# Altium PCB PCB.PcbDoc (part 1 of 2)
Units mil, origin at the board's own origin, x right, y up, seen from the top; angles counter-clockwise.
Board outline 3500 x 2500 mil, 4 copper layers (Layer 1, Layer 2, Layer 3, Layer 4), stack 23.756 mil thick; 83 components, 64 nets, 341 pads, 402 vias.
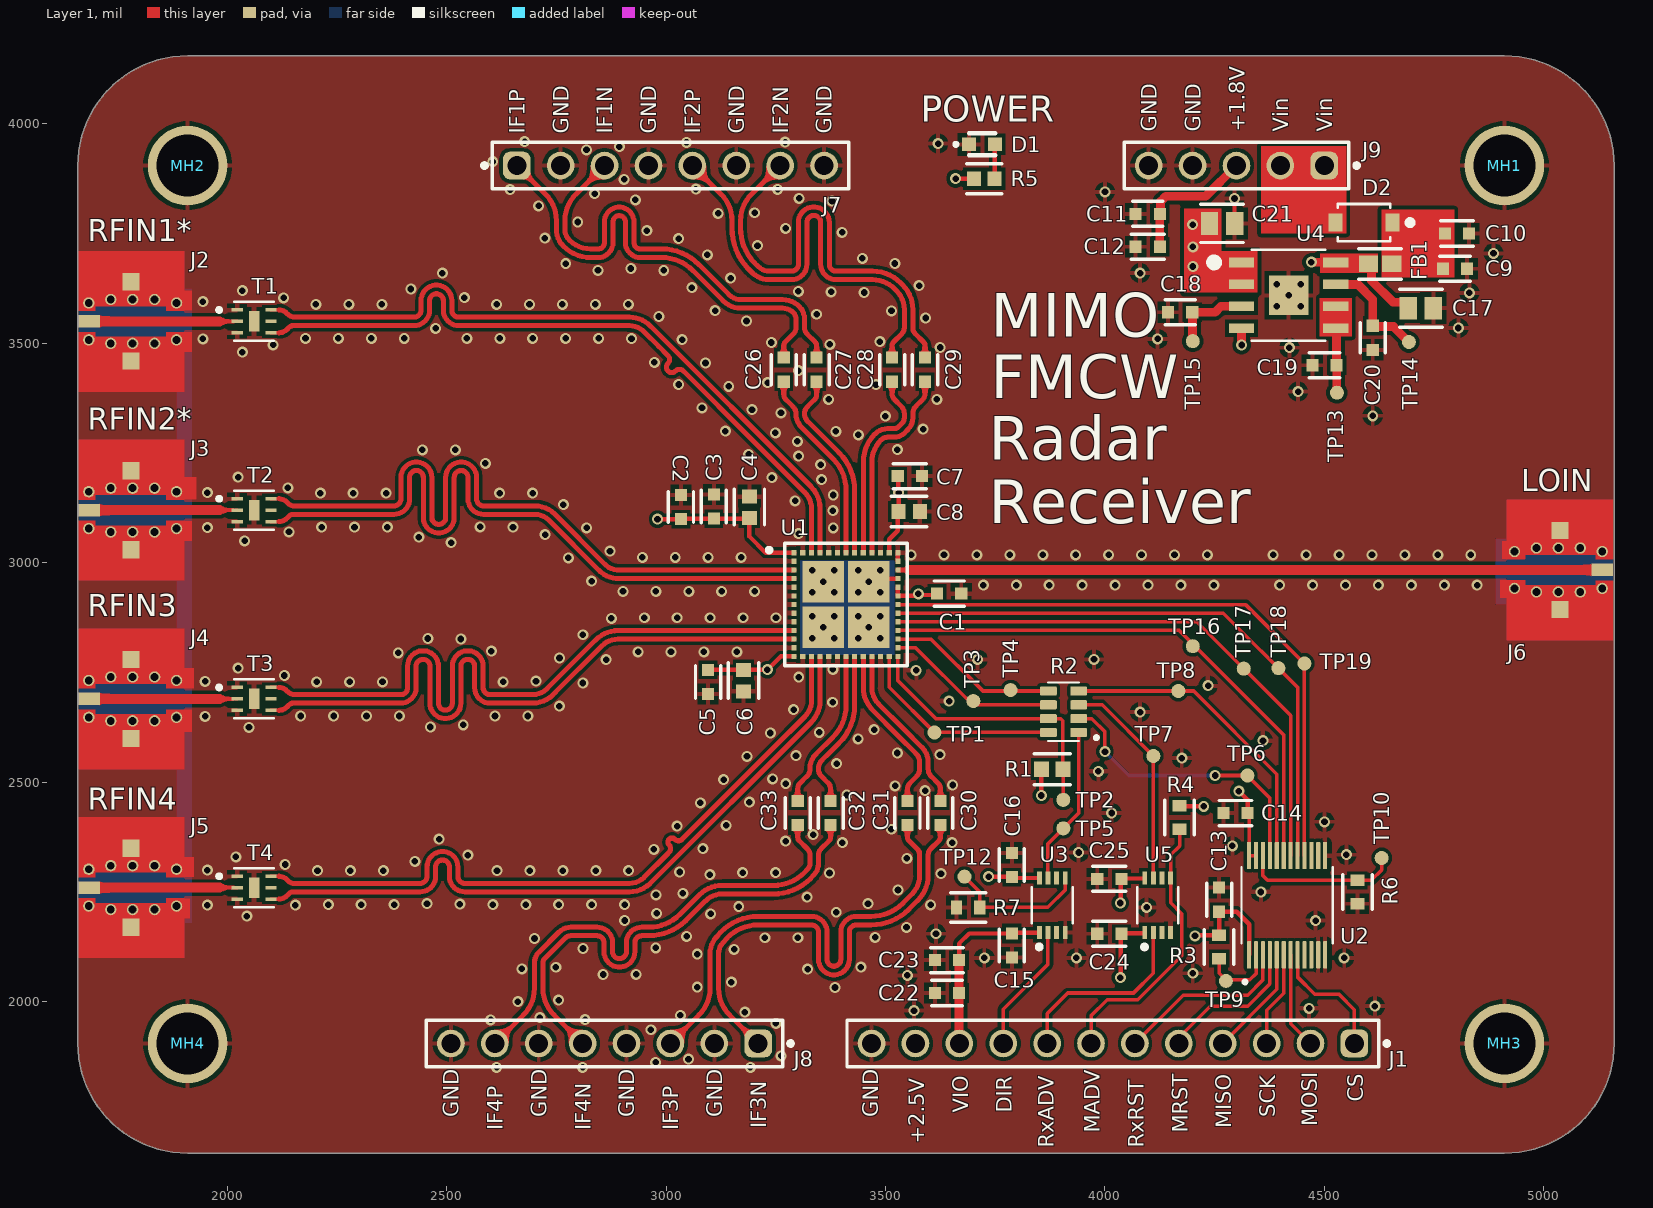
[diagram p0: Layer 1 view]
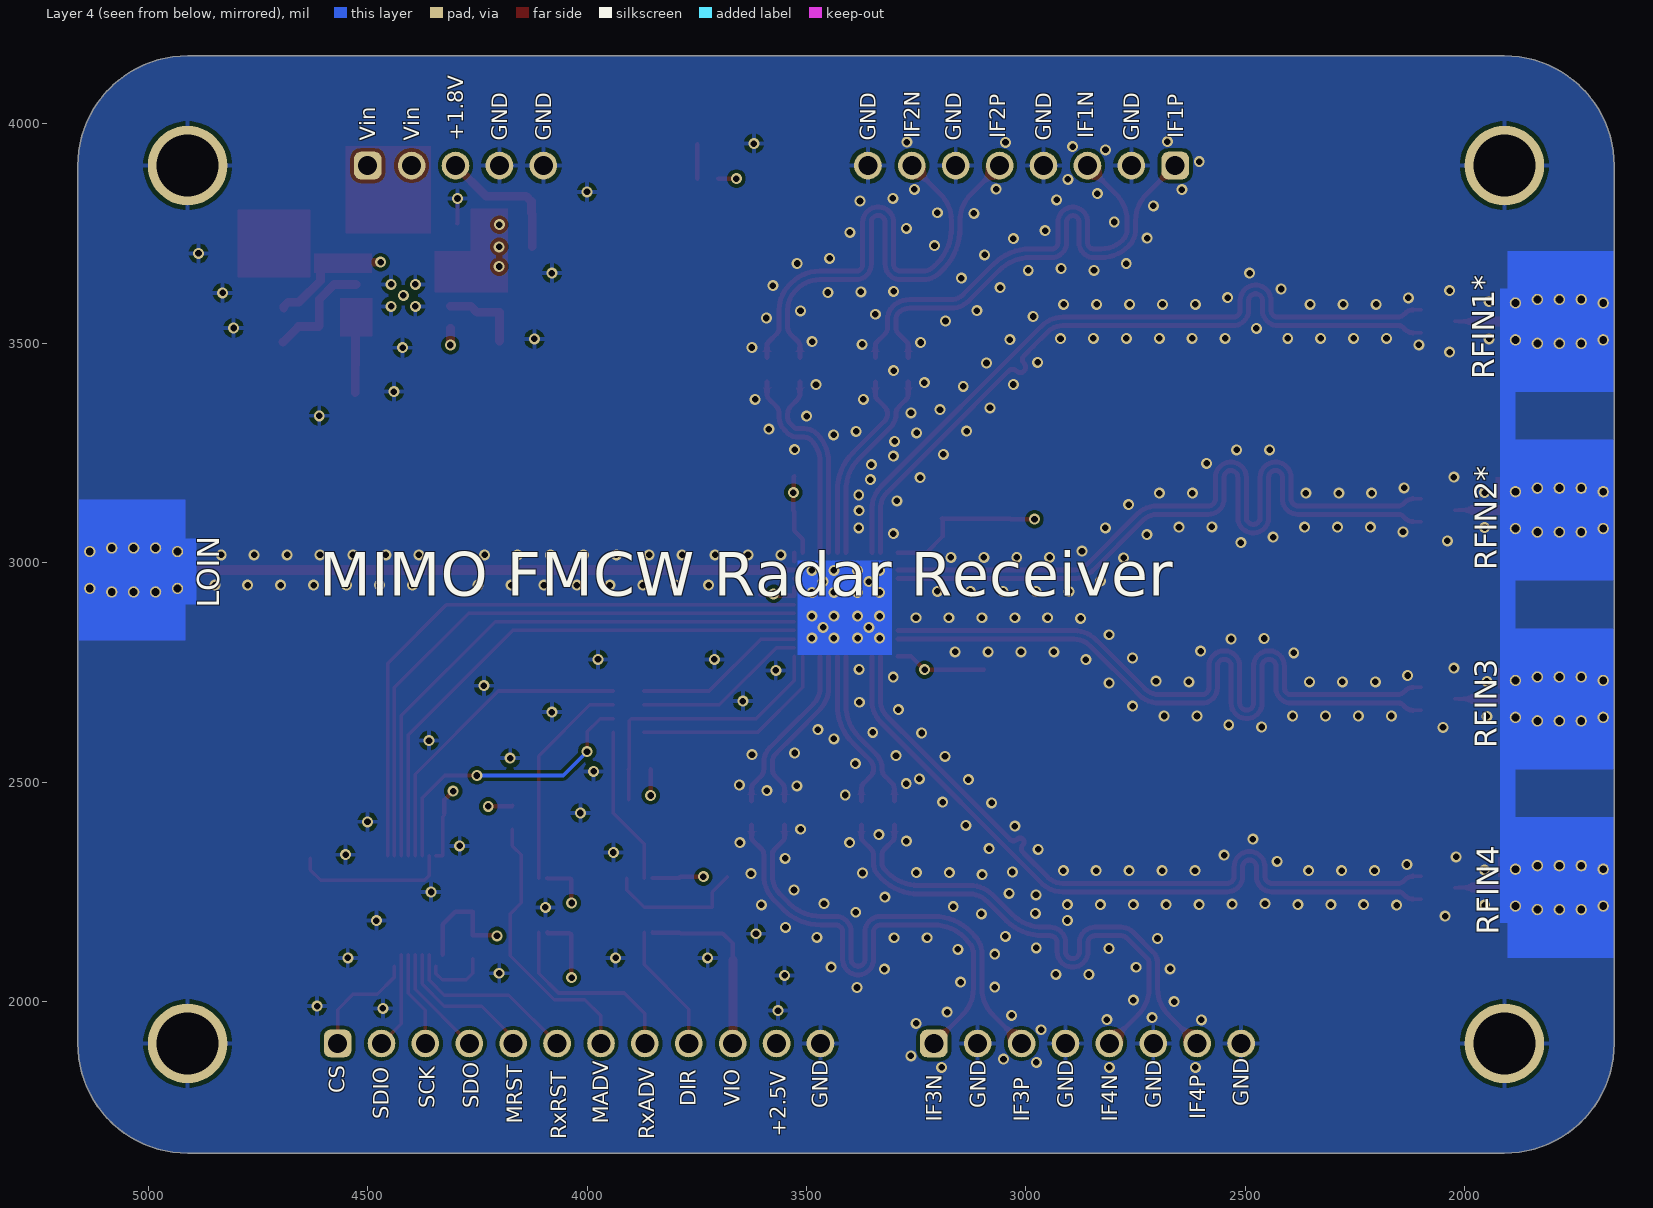
[diagram p1: Layer 4 view, seen from below]
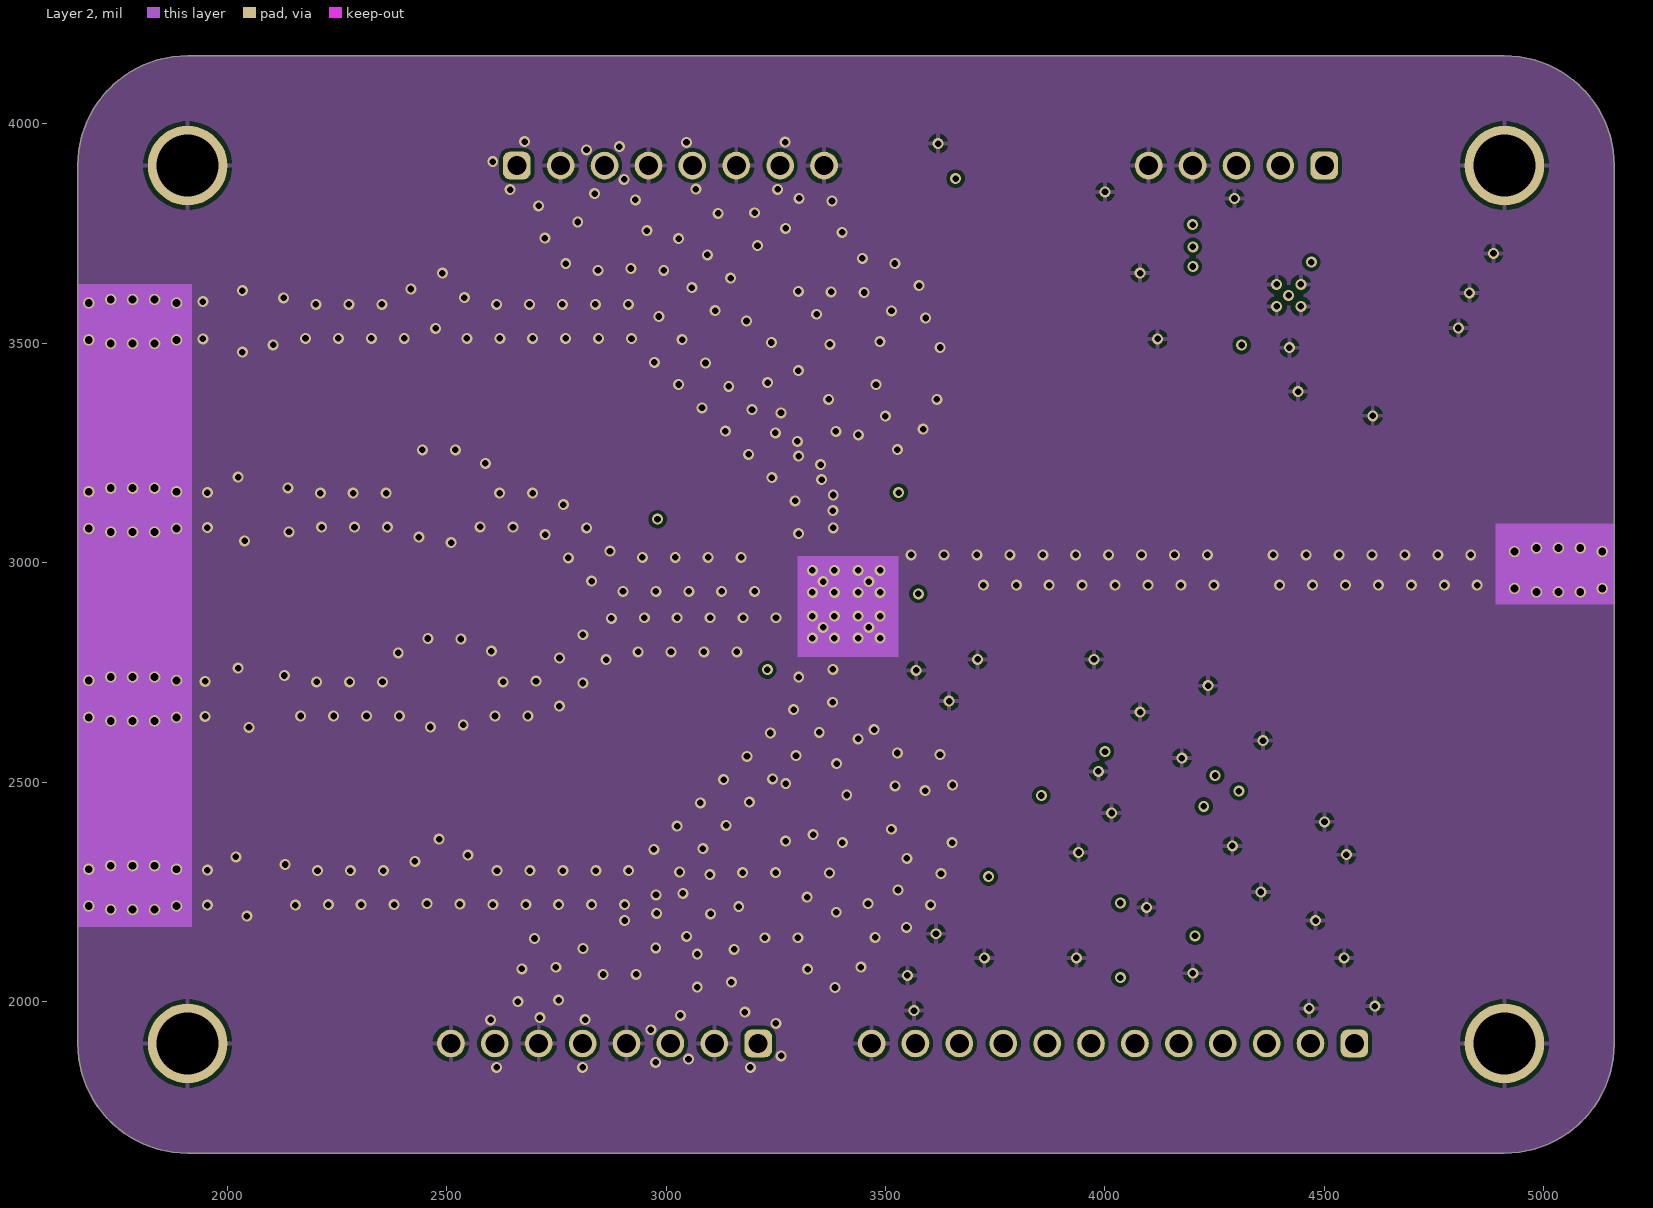
[diagram p2: Layer 2]
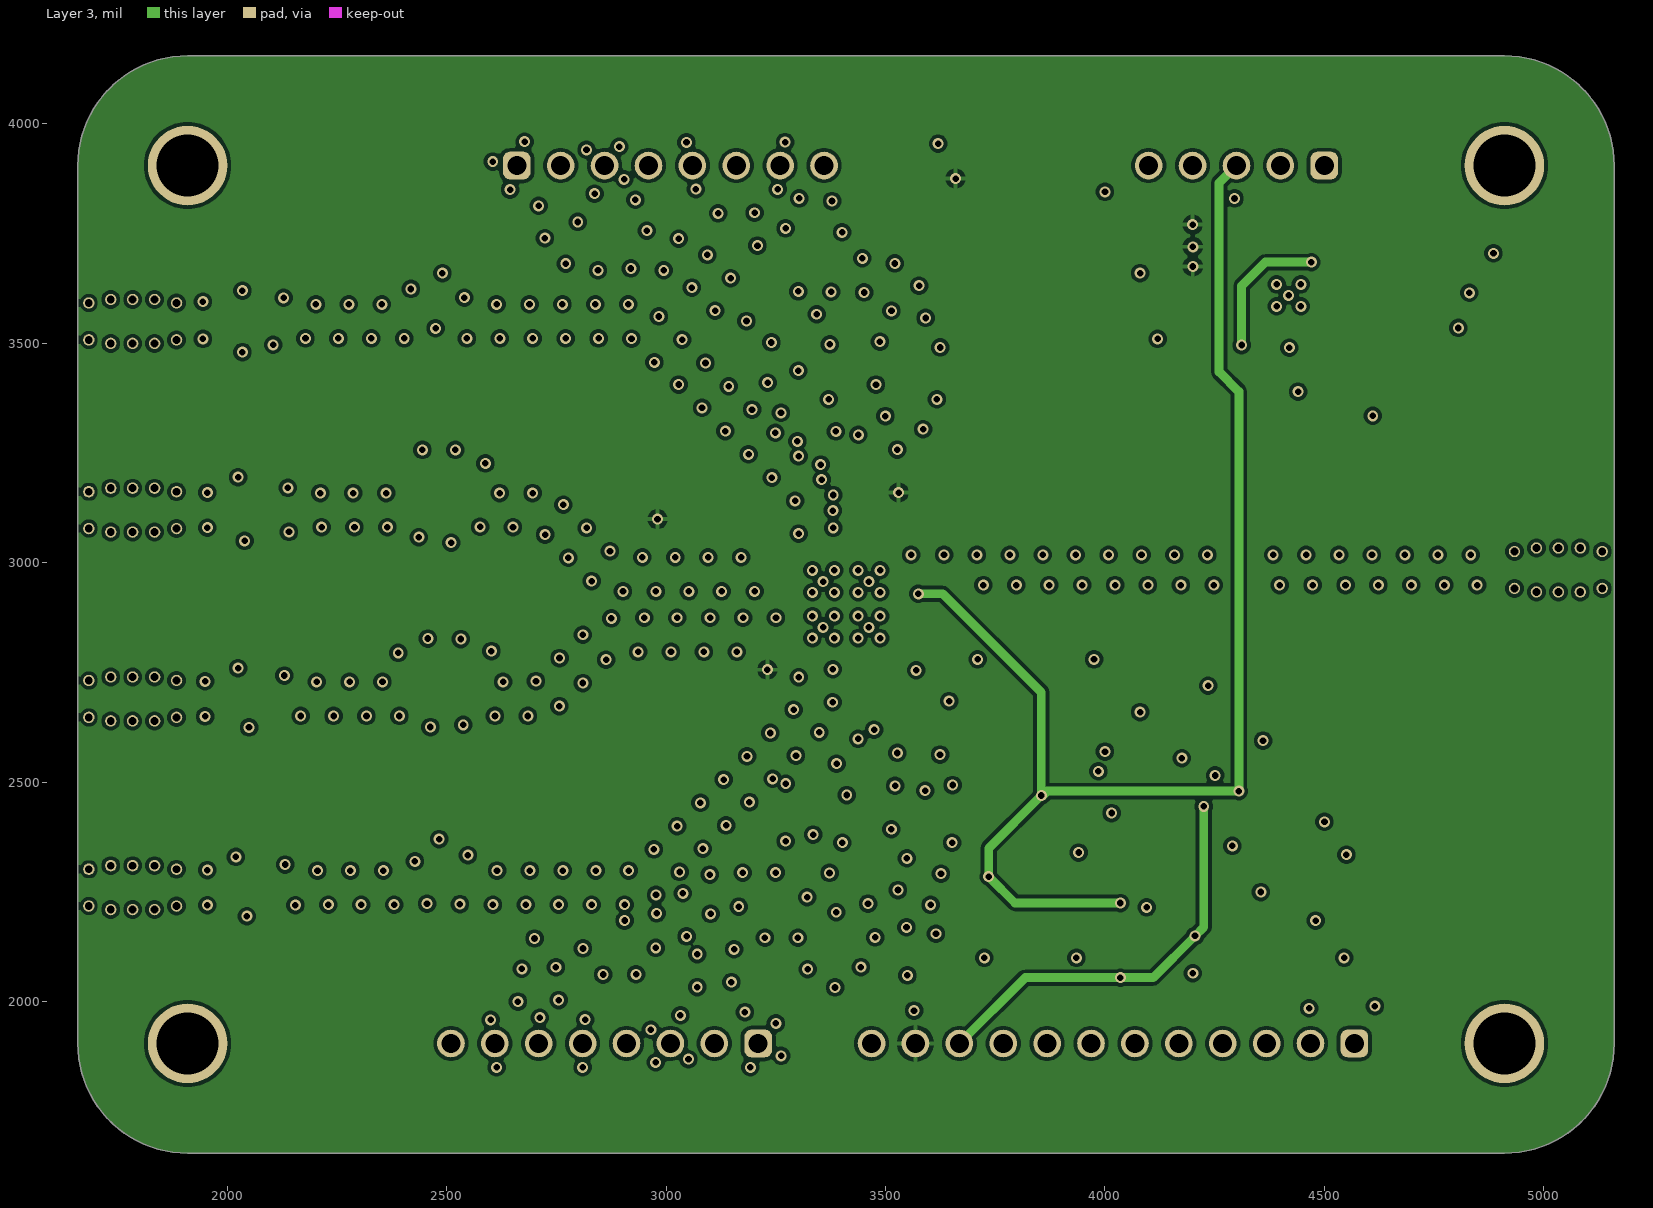
[diagram p3: Layer 3]
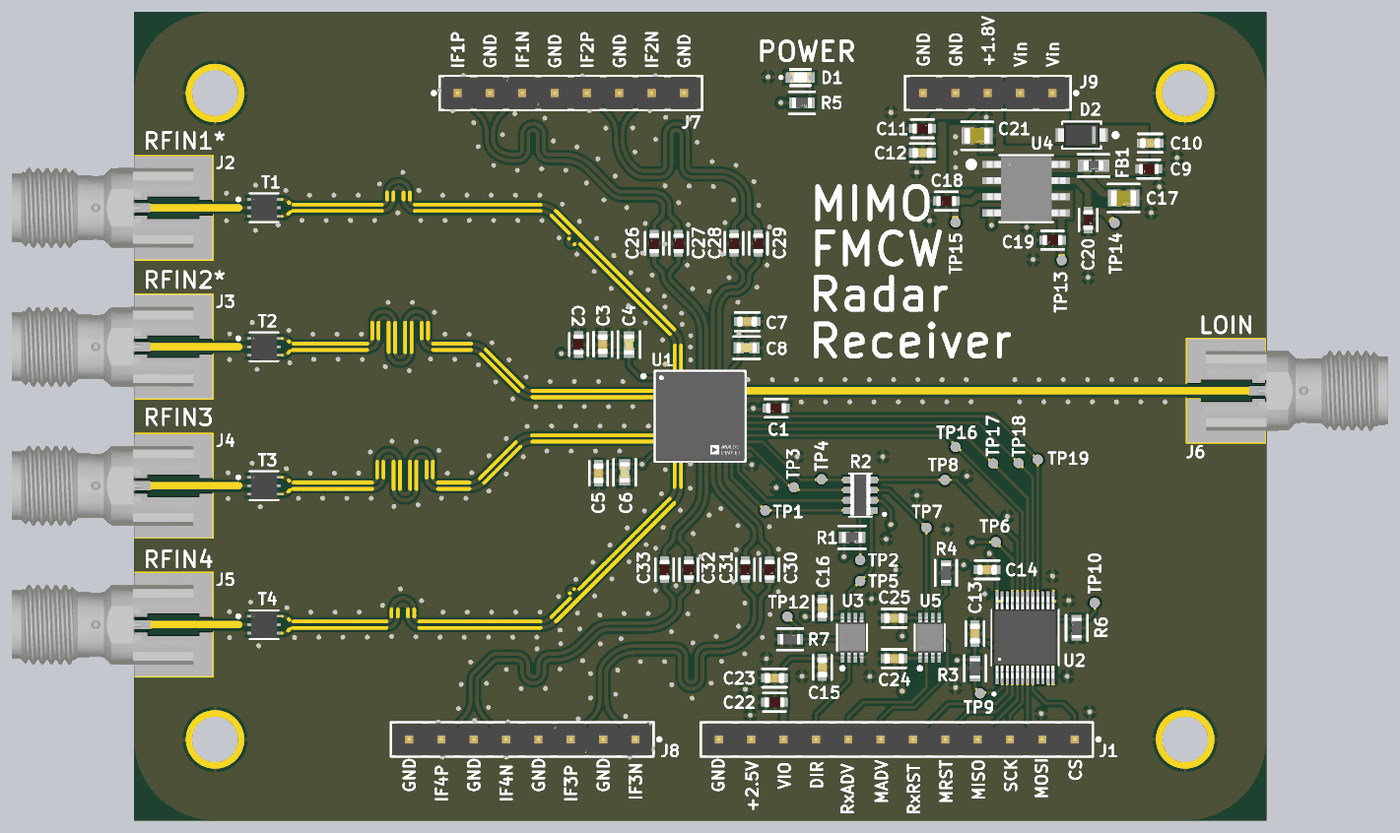
[diagram p5: 3D render of the assembled board from above, using the file's embedded part models]

## Layer stack, top to bottom
Top Solder: solder mask 0.4, Solder Resist, Dk 3.5
Layer 1: signal copper 1.378
Dielectric 2: prepreg 2.8, PP-006, Dk 4.1
Layer 2: signal copper 1.4
Dielectric 1: dielectric 12.6, FR-4, Dk 4.8
Layer 3: signal copper 1.4
Dielectric 3: prepreg 2.8, PP-006, Dk 4.1
Layer 4: signal copper 1.378
Bottom Solder: solder mask 0.4, Solder Resist, Dk 3.5

## Board outline
1660,1905 1660,3905 cw(c1910,3905) 1910,4155 4910,4155 cw(c4910,3905) 5160,3905 5160,1905 cw(c4910,1905) 4910,1655 1910,1655 cw(c1910,1905)

## Design rules (kind name [scope] priority, off if disabled: settings)
Clearance [All] p1: gap=8 ignorepadtopadclearanceinfootprint=TRUE except(6: Arc-Arc Arc-Track Arc-SMDPad Track-Track Track-SMDPad SMDPad-SMDPad)
DiffPairsRouting [All] p1: maxlimit=8 minlimit=8 mostfreqgap=8 toplayer_minwidth=11.46 toplayer_maxwidth=11.46 toplayer_prefwidth=11.46 midlayer1_minwidth=11.46 midlayer1_maxwidth=11.46 midlayer1_prefwidth=11.46 midlayer2_minwidth=11.46 midlayer2_maxwidth=11.46 midlayer2_prefwidth=11.46 bottomlayer_minwidth=11.46 bottomlayer_maxwidth=11.46 bottomlayer_prefwidth=11.46 maxuncoupledlength=500
HoleSize [All] p1: absolutevalues=TRUE maxlimit=50000 minlimit=1 maxpercent=80.000 minpercent=20.000
HoleToHoleClearance [All] p1: gap=6 allowstackedmicrovias=TRUE
MinimumSolderMaskSliver [All] p1: minsoldermaskwidth=6
PolygonConnect PolygonConnectViaShield [InNamedUnion('Via Shieldings') OR InNamedUnion('Via Shieldings 1') OR InNamedUnion('Via Shieldings 2') OR InNamedUnion('Via Shieldings 3') OR InNamedUnion('Via Shieldings 4') OR InNamedUnion('Via Shieldings 5') OR InNamedUnion('Via Shieldings 6') OR InNamedUnion('Via Shieldings 7') OR InNamedUnion('Via Shieldings 8') OR InNamedUnion('Via Shieldings 9')  OR InNamedUnion('Via Shieldings 10') OR InNamedUnion('Via Shieldings 11')  OR InNamedUnion('Via Shieldings 12')] p1: connectstyle=Direct reliefconductorwidth=10 reliefentries=4 polygonreliefangle="90 Angle" airgapwidth=10
PolygonConnect [All] p2: connectstyle=Relief reliefconductorwidth=10 reliefentries=4 polygonreliefangle="90 Angle" airgapwidth=10
RoutingVias [All] p1: holewidth=28 width=50 viastyle="Through Hole" minholewidth=28 minwidth=50 maxholewidth=28 maxwidth=50
SilkToSolderMaskClearance [IsPad] p1: minsilkscreentomaskgap=6 clearancetoexposedcopper=TRUE
SolderMaskExpansion [All] p1: expansion=4 istentingtop=FALSE
SupplyNets "Schematic Supply Nets_6" [InNet('VLogic')] p1: voltage=0.000
SupplyNets "Schematic Supply Nets_5" [InNet('VinF')] p2: voltage=0.000
SupplyNets "Schematic Supply Nets_4" [InNet('+1.8')] p3: voltage=0.000
SupplyNets "Schematic Supply Nets_3" [InNet('Vin')] p4: voltage=0.000
SupplyNets "Schematic Supply Nets_2" [InNet('GND')] p5: voltage=0.000
SupplyNets "Schematic Supply Nets" [InNet('+2.5')] p6: voltage=0.000
Width [All] p1: maxlimit=5000 minlimit=6 preferedwidth=10
25 further rules are at their usual default settings.

## Classes and differential pairs
component class Power: C9 C10 C11 C12 C17 C18 C19 C20 C21 C22 C23 D1 D2 FB1 R5 TP13 TP14 TP15 U4
component class Interface: C13 C14 C15 C16 C24 C25 C26 C27 C28 C29 C30 C31 C32 C33 J1 J2 J3 J4 J5 J6 J7 J8 J9 R3 R4 R6 R7 TP9 TP10 TP12 TP16 TP17 TP18 TP19 U2 U3 U5
component class Receiver: C1 C2 C3 C4 C5 C6 C7 C8 MH1 MH2 MH3 MH4 R1 R2 T1 T2 T3 T4 TP1 TP2 TP3 TP4 TP5 TP6 TP7 TP8 U1
differential pair IFOUT4_CAP: +IFOUT4_CAP_P -IFOUT4_CAP_N
differential pair IFOUT3_CAP: +IFOUT3_CAP_P -IFOUT3_CAP_N
differential pair IFOUT2_CAP: +IFOUT2_CAP_P -IFOUT2_CAP_N
differential pair IFOUT1_CAP: +IFOUT1_CAP_P -IFOUT1_CAP_N
differential pair RFIN4: +RFIN4_P -RFIN4_N
differential pair RFIN3: +RFIN3_P -RFIN3_N
differential pair RFIN2: +RFIN2_P -RFIN2_N
differential pair RFIN1: +RFIN1_P -RFIN1_N
differential pair IFOUT4: +IFOUT4_P -IFOUT4_N
differential pair IFOUT3: +IFOUT3_P -IFOUT3_N
differential pair IFOUT2: +IFOUT2_P -IFOUT2_N
differential pair IFOUT1: +IFOUT1_P -IFOUT1_N

## Components (designator, comment, footprint, x,y, rotation, side; value= is the part's Value field where it differs from the comment)
C1 "1 μF" FP-0603-L_1_6_0_15-W_0_8-MFG 3645,2930 r180 top value=1uF
C2 "1 μF" FP-0603-L_1_6_0_15-W_0_8-MFG 3034.08,3126.95 r270 top value=1uF
C3 "10 nF" CGA3E2X7R1H103K080AA-Footprint-1 3109.04,3128.14 r90 top value=10nF
C4 "100 pF" FP-C0603C-CF-IPC_C 3189.91,3126.78 r90 top value=100pF
C5 "10 nF" CGA3E2X7R1H103K080AA-Footprint-1 3095.71,2728.59 r270 top value=10nF
C6 "100 pF" FP-C0603C-CF-IPC_C 3176.57,2731.49 r270 top value=100pF
C7 "10 nF" CGA3E2X7R1H103K080AA-Footprint-1 3555.46,3197.64 r0 top value=10nF
C8 "100 pF" FP-C0603C-CF-IPC_C 3553.81,3116.77 r0 top value=100pF
C9 "1 μF" FP-0603-L_1_6_0_15-W_0_8-MFG 4797.56,3670 r180 top value=1uF
C10 "100 nF" FP-CGA3E-0_3-0_1-MFG 4801.71,3750.23 r0 top value=100nF
C11 "1 μF" FP-0603-L_1_6_0_15-W_0_8-MFG 4097.44,3795 r0 top value=1uF
C12 "100 nF" FP-CGA3E-0_3-0_1-MFG 4097.44,3720.04 r180 top value=100nF
C13 "100 nF" FP-CGA3E-0_3-0_1-MFG 4260,2232.56 r90 top value=100nF
C14 "100 nF" FP-CGA3E-0_3-0_1-MFG 4297.56,2430 r180 top value=100nF
C15 "100 nF" FP-CGA3E-0_3-0_1-MFG 3788.02,2128.1 r270 top value=100nF
C16 "100 nF" FP-CGA3E-0_3-0_1-MFG 3788.02,2311.65 r90 top value=100nF
C17 "10 μF" FP-GRM21B-0_15-IPC_C 4719.57,3580.28 r0 top value=10uF
C18 "1 μF" FP-0603-L_1_6_0_15-W_0_8-MFG 4171.25,3570.86 r180 top value=1uF
C19 "1 μF" FP-0603-L_1_6_0_15-W_0_8-MFG 4500,3450 r180 top value=1uF
C20 "1 μF" FP-0603-L_1_6_0_15-W_0_8-MFG 4610,3512.56 r270 top value=1uF
C21 "10 μF" FP-GRM21B-0_15-IPC_C 4266.71,3773.08 r0 top value=10uF
C22 "1 μF" FP-0603-L_1_6_0_15-W_0_8-MFG 3640,2020 r0 top value=1uF
C23 "100 nF" FP-CGA3E-0_3-0_1-MFG 3640,2095 r180 top value=100nF
C24 "100 nF" FP-CGA3E-0_3-0_1-MFG 4010,2155 r180 top value=100nF
C25 "100 nF" FP-CGA3E-0_3-0_1-MFG 4010,2280 r180 top value=100nF
C26 "1 μF" FP-0603-L_1_6_0_15-W_0_8-MFG 3268.22,3440 r90 top value=1uF
C27 "1 μF" FP-0603-L_1_6_0_15-W_0_8-MFG 3343.18,3440 r90 top value=1uF
C28 "1 μF" FP-0603-L_1_6_0_15-W_0_8-MFG 3515,3440 r90 top value=1uF
C29 "1 μF" FP-0603-L_1_6_0_15-W_0_8-MFG 3589.96,3440 r90 top value=1uF
C30 "1 μF" FP-0603-L_1_6_0_15-W_0_8-MFG 3624.96,2430 r270 top value=1uF
C31 "1 μF" FP-0603-L_1_6_0_15-W_0_8-MFG 3550,2430 r270 top value=1uF
C32 "1 μF" FP-0603-L_1_6_0_15-W_0_8-MFG 3374.96,2430 r270 top value=1uF
C33 "1 μF" FP-0603-L_1_6_0_15-W_0_8-MFG 3300,2430 r270 top value=1uF
D1 "LTST-C190KRKT" LTST-C190KRKT-Footprint-1 3720.24,3953.39 r0 top
D2 "PMEG2010BER,115" PMEG2010BER,115-Footprint-1 4590,3775 r180 top
FB1 "BLM18AG601SN1D" FP-BLM18-0_15-t0_8-IPC_B 4626.68,3680.95 r0 top value=380mΩ
J1 "61301211121" 61301211121 4018.23,1905 r180 top
J2 "142-1701-831" 142-1701-831-Footprint-1 1781,3550 r90 top locked
J3 "142-1701-831" 142-1701-831-Footprint-1 1781,3120 r90 top locked
J4 "142-1701-831" 142-1701-831-Footprint-1 1781,2690 r90 top locked
J5 "142-1701-831" 142-1701-831-Footprint-1 1781,2260 r90 top locked
J6 "142-1701-831" 142-1701-831-Footprint-1 5036.8,2983.74 r270 top
J7 "61300811121" 61300811121 3010,3905 r0 top
J8 "61300811121" 61300811121 2860,1905 r180 top
J9 "61300511121" 61300511121 4299.53,3905 r180 top (schematic designator J7)
MH1 "M3 Plated Mounting Hole - Loose" "M3 Plated Mounting Hole-Footprint-1" 4910,3905 r0 top locked
MH2 "M3 Plated Mounting Hole - Loose" "M3 Plated Mounting Hole-Footprint-1" 1910,3905 r0 top locked
MH3 "M3 Plated Mounting Hole - Loose" "M3 Plated Mounting Hole-Footprint-1" 4910,1905 r0 top locked
MH4 "M3 Plated Mounting Hole - Loose" "M3 Plated Mounting Hole-Footprint-1" 1910,1905 r0 top locked
R1 "200 kΩ" FP-RG1608-IPC_C 3880,2530 r0 top value=200kΩ
R2 "22 Ω" CAY16-22R0F4LF-Footprint-1 3905.55,2660.75 r180 top value=22Ω
R3 "10 kΩ" FP-RC0603-0_55-IPC_C 4260,2125 r90 top value=10kR
R4 "10 kΩ" FP-RC0603-0_55-IPC_C 4170,2420 r90 top value=10kR
R5 "150 Ω" FP-RMCF0603-IPC_C 3725,3875 r0 top value=150Ω
R6 "10 kΩ" FP-RC0603-0_55-IPC_C 4575,2250 r90 top value=10kR
R7 "10 kΩ" FP-RC0603-0_55-IPC_C 3688.36,2215 r0 top value=10kR
T1 "MTY2-243+" MTY2-243+-Footprint-1 2066.5,3550 r0 top
T2 "MTY2-243+" MTY2-243+-Footprint-1 2066.5,3120 r0 top
T3 "MTY2-243+" MTY2-243+-Footprint-1 2066.5,2690 r0 top
T4 "MTY2-243+" MTY2-243+-Footprint-1 2066.5,2260 r0 top
TP1 "Test Point - 32 mil" "Test Point - 32 mil-Footprint-1" 3611.5,2613.5 r90 top
TP2 "Test Point - 32 mil" "Test Point - 32 mil-Footprint-1" 3905,2460 r90 top
TP3 "Test Point - 32 mil" "Test Point - 32 mil-Footprint-1" 3700,2685 r90 top
TP4 "Test Point - 32 mil" "Test Point - 32 mil-Footprint-1" 3785,2710 r90 top
TP5 "Test Point - 32 mil" "Test Point - 32 mil-Footprint-1" 3905.08,2395.08 r90 top
TP6 "Test Point - 32 mil" "Test Point - 32 mil-Footprint-1" 4324.5,2515.5 r90 top
TP7 "Test Point - 32 mil" "Test Point - 32 mil-Footprint-1" 4110.16,2559.84 r90 top
TP8 "Test Point - 32 mil" "Test Point - 32 mil-Footprint-1" 4167.01,2707.99 r90 top
TP9 "Test Point - 32 mil" "Test Point - 32 mil-Footprint-1" 4275.5,2047.52 r90 top
TP10 "Test Point - 32 mil" "Test Point - 32 mil-Footprint-1" 4630.26,2327.48 r90 top
TP12 "Test Point - 32 mil" "Test Point - 32 mil-Footprint-1" 3680,2285 r90 top
TP13 "Test Point - 32 mil" "Test Point - 32 mil-Footprint-1" 4528.38,3387.52 r90 top
TP14 "Test Point - 32 mil" "Test Point - 32 mil-Footprint-1" 4692.36,3503.03 r90 top
TP15 "Test Point - 32 mil" "Test Point - 32 mil-Footprint-1" 4200,3505 r90 top
TP16 "Test Point - 32 mil" "Test Point - 32 mil-Footprint-1" 4200,2810 r90 top
TP17 "Test Point - 32 mil" "Test Point - 32 mil-Footprint-1" 4316.12,2758.88 r90 top
TP18 "Test Point - 32 mil" "Test Point - 32 mil-Footprint-1" 4395,2760 r90 top
TP19 "Test Point - 32 mil" "Test Point - 32 mil-Footprint-1" 4454.37,2770.63 r90 top
U1 "ADAR2004ACCZ" FP-CC-48-2-MFG 3410,2905 r0 top locked
U2 "SN74LVC8T245DGVR" SN74LVC8T245DGVR-Footprint-1 4415,2225 r90 top
U3 "74AXP2T45DCH" 74AXP2T45DCH-Footprint-1 3890,2230 r90 top
U4 "ADP7156ARDZ-2.5-R7" ADP7156ARDZ-2.5-R7-Footprint-1 4418.47,3614.33 r0 top
U5 "74AXP2T45DCH" 74AXP2T45DCH-Footprint-1 4130,2230 r90 top

## Footprints (in the part's own frame and the unit in brackets; to place one, negate y for a bottom-side part, rotate by r counter-clockwise, add the part's x,y. Pads: shape width x height; smd on the part's side, far side on the other; paste and mask are expansions set on the pad)
74AXP2T45DCH-Footprint-1 [mil]
  rect 29.78x11 smd paste+0 mask+0: 1(-71.89,39.53) 2(-71.89,19.84) 3(-71.89,0.16) 4(-71.89,-19.53) 5(51.89,-19.53) 6(51.89,0.16) 7(51.89,19.84) 8(51.89,39.53)
  silkscreen extent -110,-36 31,56, body extent -73,-31 53,51, height 39
142-1701-831-Footprint-1 [mil]
  rect 28.5x50 smd: 1(0,96)
  rect 39.37x39.37 smd paste-39.37 mask+0: 2(-90,0) 2(90,0)
  round 25.87 hole 18: 2(-50,-54) 2(-50,-4) 2(-50,46) 2(-42,96) 2(-42,-104) 2(42,96) 2(42,-104) 2(50,-54) 2(50,-4) 2(50,46)
  Layer 1 region: -24.25,81 -35,81 -35,-81 -24.25,-81 -24.25,-121 -160,-121 -160,121 -24.25,121
  Layer 1 region: 160,-121 24.25,-121 24.25,-81 35,-81 35,81 24.25,81 24.25,121 160,121
  Layer 4 region: 160,-121 -160,-121 -160,121 160,121
  body extent -123,-62 123,500, height 131
61300511121 [mm] "Pin Header, pitch 2.54 mm, THT, Vertical, single row, 5p"
  rrect50% 1.6x1.6 hole 1.1: 1(-5.08,0)
  round 1.6 hole 1.1: 2(-2.54,0) 3(0,0) 4(2.54,0) 5(5.08,0)
  silkscreen extent -7.07,-1.35 6.5,1.35, body extent -6.35,-1.27 6.35,1.27, height 8.57
61300811121 [mm] "Pin Header, pitch 2.54 mm, THT, Vertical, single row, 8p"
  rrect50% 1.6x1.6 hole 1.1: 1(-8.89,0)
  round 1.6 hole 1.1: 2(-6.35,0) 3(-3.81,0) 4(-1.27,0) 5(1.27,0) 6(3.81,0) 7(6.35,0) 8(8.89,0)
  silkscreen extent -10.88,-1.35 10.31,1.35, body extent -10.16,-1.27 10.16,1.27, height 8.57
61301211121 [mm] "Pin Header, pitch 2.54 mm, THT, Vertical, single row, 12p"
  rrect50% 1.6x1.6 hole 1.1: 1(-13.97,0)
  round 1.6 hole 1.1: 2(-11.43,0) 3(-8.89,0) 4(-6.35,0) 5(-3.81,0) 6(-1.27,0) 7(1.27,0) 8(3.81,0) 9(6.35,0) 10(8.89,0) 11(11.43,0) 12(13.97,0)
  silkscreen extent -15.96,-1.35 15.39,1.35, body extent -15.24,-1.27 15.24,1.27, height 8.57
ADP7156ARDZ-2.5-R7-Footprint-1 [mil]
  rect 57.55x22 smd paste+0 mask+0: 1(-107.27,70) 2(-107.27,20) 3(-107.27,-30) 4(-107.27,-80) 5(107.27,-80) 6(107.27,-30) 7(107.27,20) 8(107.27,70)
  rect 90x90 smd paste+0 mask+0: EP(0,-5)
  silkscreen extent -178,-108 84,98, body extent -122,-104 122,94, height 69
CAY16-22R0F4LF-Footprint-1 [mm]
  rrect25% 0.97x0.53 smd: 1(-0.875,1.2) 2(-0.875,0.4) 3(-0.875,-0.4) 4(-0.875,-1.2) 5(0.875,-1.2) 6(0.875,-0.4) 7(0.875,0.4) 8(0.875,1.2)
  silkscreen extent -2,-1.7 0.9,1.7, body extent -0.8,-1.6 0.8,1.6, height 0.6
CGA3E2X7R1H103K080AA-Footprint-1 [mm]
  rect 0.7x0.7 smd paste+0 mask+0: 1(-0.7,0) 2(0.7,0)
  silkscreen extent -0.95,-0.72 0.95,0.72, body extent -1.15,-0.65 1.15,0.65, height 0.25
FP-0603-L_1_6_0_15-W_0_8-MFG [mm]
  rect 0.7x0.7 smd paste+0 mask+0: 1(-0.7,0) 2(0.7,0)
  silkscreen extent -0.87,-0.72 0.87,0.72, body extent -1.15,-0.58 1.15,0.58, height 0.25
FP-BLM18-0_15-t0_8-IPC_B [mil]
  rect 43.55x37.73 smd paste+0 mask+0: 1(-26.62,0) 2(26.62,0)
  silkscreen extent -48,-35 48,35, body extent -58,-29 58,29, height 10
FP-C0603C-CF-IPC_C [mil]
  rect 31.75x33.79 smd paste+0 mask+0: 1(-24.64,0) 2(24.64,0)
  silkscreen extent -41,-34 41,34, body extent -44,-23 44,23, height 10
FP-CC-48-2-MFG [mm]
  rect 0.3x0.3 smd paste+0 mask+0: 1(-3,3) 2(-3,2.5) 3(-3,2) 4(-3,1.5) 5(-3,1) 6(-3,0.5) 7(-3,0) 8(-3,-0.5) 9(-3,-1) 10(-3,-1.5) 11(-3,-2) 12(-3,-2.5) 13(-3,-3) 14(-2.5,-3) 15(-2,-3) 16(-1.5,-3) 17(-1,-3) 18(-0.5,-3) 19(0,-3) 20(0.5,-3) 21(1,-3) 22(1.5,-3) 23(2,-3) 24(2.5,-3) 25(3,-3) 26(3,-2.5) 27(3,-2) 28(3,-1.5) 29(3,-1) 30(3,-0.5) 31(3,0) 32(3,0.5) 33(3,1) 34(3,1.5) 35(3,2) 36(3,2.5) 37(3,3) 38(2.5,3) 39(2,3) 40(1.5,3) 41(1,3) 42(0.5,3) 43(0,3) 44(-0.5,3) 45(-1,3) 46(-1.5,3) 47(-2,3) 48(-2.5,3)
  rect 2.4x2.4 smd paste+0 mask+0: 49(-1.325,1.325) 50(1.325,1.325) 51(-1.325,-1.325) 52(1.325,-1.325)
  silkscreen extent -4.57,-3.55 3.55,3.55, body extent -4.05,-4.05 4.05,4.05, height 0.25
FP-CGA3E-0_3-0_1-MFG [mm]
  rect 0.7x0.7 smd paste+0 mask+0: 1(-0.7,0) 2(0.7,0)
  silkscreen extent -0.95,-0.72 0.95,0.72, body extent -1.15,-0.65 1.15,0.65, height 0.25
FP-GRM21B-0_15-IPC_C [mil]
  rect 39.6x51.5 smd paste+0 mask+0: 1(-28.59,0) 2(28.59,0)
  silkscreen extent -48,-43 48,43, body extent -52,-31 52,31, height 10
FP-RC0603-0_55-IPC_C [mil]
  rect 25.93x31.97 smd paste+0 mask+0: 1(-26.64,0) 2(26.64,0)
  silkscreen extent -40,-33 40,33, body extent -44,-22 44,22, height 10
FP-RG1608-IPC_C [mil]
  rect 33.66x35.68 smd paste+0 mask+0: 1(-24.63,0) 2(24.63,0)
  silkscreen extent -41,-35 41,35, body extent -45,-24 45,24, height 10
FP-RMCF0603-IPC_C [mil]
  rect 31.73x33.79 smd paste+0 mask+0: 1(-23.66,0) 2(23.66,0)
  silkscreen extent -40,-34 40,34, body extent -43,-23 43,23, height 10
LTST-C190KRKT-Footprint-1 [mm]
  rect 0.8x0.8 smd mask+0: 1(-0.762,0) 2(0.738,0)
  silkscreen extent -1.6,-0.64 0.76,0.64, body extent -0.8,-0.4 0.8,0.4, height 0.8
"M3 Plated Mounting Hole-Footprint-1" [mm]
  round 4.6 hole 3.6 paste-2539.97 mask+0: 1(0,0)
MTY2-243+-Footprint-1 [mil]
  rect 26x8 smd paste+0 mask+0: 1(-43.5,26) 2(-43.5,0) 3(-43.5,-26) 4(33.5,-26) 5(33.5,0) 6(33.5,26)
  rect 24x47 smd paste+0 mask+0: 7(-5,0)
  silkscreen extent -88,-44 40,44, body extent -44,-39 34,39, height 41
PMEG2010BER,115-Footprint-1 [mil]
  rect 32x41 smd paste+0 mask+0: 1(-65,0) 2(65,0)
  silkscreen extent -110,-43 60,43, body extent -73,-37 73,37, height 43
SN74LVC8T245DGVR-Footprint-1 [mm]
  rrect25% 1.57x0.24 smd: 1(-2.997,2.2) 2(-2.997,1.8) 3(-2.997,1.4) 4(-2.997,1) 5(-2.997,0.6) 6(-2.997,0.2) 7(-2.997,-0.2) 8(-2.997,-0.6) 9(-2.997,-1) 10(-2.997,-1.4) 11(-2.997,-1.8) 12(-2.997,-2.2) 13(2.743,-2.2) 14(2.743,-1.8) 15(2.743,-1.4) 16(2.743,-1) 17(2.743,-0.6) 18(2.743,-0.2) 19(2.743,0.2) 20(2.743,0.6) 21(2.743,1) 22(2.743,1.4) 23(2.743,1.8) 24(2.743,2.2)
  silkscreen extent -4.67,-2.64 2.07,2.64, body extent -3.33,-2.5 3.07,2.5, height 1.2
"Test Point - 32 mil-Footprint-1" [mil]
  round 32 smd: 1(0,0)

## Part data
C1 C2 C9 C11 C18 C19 C20 C22 C26 C27 C28 C29 C30 C31 C32 C33: library part CMP-00100-1, "Ceramic Capacitor, Multilayer, Ceramic, 50V, 10% +Tol, 10% -Tol, X7R, 15% TC, 1uF, Surface Mount, 0603", Capacitor Type=Ceramic, Case/Package=0603, Max Operating Temperature=125°C, Min Operating Temperature=-55°C, Package Shape=Rectangular, Package Style=SMTMeter, Rated DC Voltage (URdc)=50V, Temperature Characteristics Code=X7R, Tolerance  (fill in as +-)=10%, Dielectric Material=Ceramic, Height=0.8mm, JESD-609 Code=e3, Length=1.6mm, Mounting Technology="Surface Mount", Multilayer=Yes, Packaging="Tape and Reel", Pins=2, Reach SVHC Compliant=Yes, RoHS Compliant=Yes, Terminal Finish=Tin, Termination=Wraparound, Tolerance (fill in as +-)=10%, Width=0.8mm
C3 C5 C7: library part CMP-00157-1, "CGA Series 0603 10 nF 50 V ±10 % Tolerance X7R SMT Multilayer Ceramic Capacitor", Case Code (Imperial)=0603, Case Code (Metric)=1608, Dielectric=X7R, Dielectric Material=Ceramic, Manufacturer Lifecycle Status=PRODUCTION, Max Operating Temperature=125°C, Min Operating Temperature=-55°C, Ratings=AEC-Q200, Tolerance=10%, Voltage Rating=50V, Case/Package=0603, China RoHS=Compliant, Composition=Ceramic, Height=800µm, Lead Free="Lead Free", Length=1.6mm, Lifecycle Status=Production, Material=Ceramic, Max Length=1.7mm, Max Width=900µm, Min Length=1.5mm, Min Width=700µm, Mounting Technology="Surface Mount", Number of Terminals=2, REACH SVHC=Yes, RoHS=Compliant, Schedule B="8532240020, 8532240020", Termination=SMD/SMT, Thickness=889µm, Voltage Rating (DC)=50V, Weight=2.012816mg, Width=800µm
C4 C6 C8: library part CMP-00365-1, "Multilayer Ceramic Capacitors MLCC – SMD/SMT; KEMET; C0603C101J5GACTU; 100 pF; 0603; 50 V; 50 V", Case Code (Imperial)=0603, Dielectric=C0G, Dielectric Material=Ceramic, Max Operating Temperature=125°C, Min Operating Temperature=-55°C, Temperature Coefficient=30ppm/°C, Tolerance=5%, Voltage=50V, Case/Package=0603, China RoHS=Compliant, Contact Material=Tin, Country of Origin="Mainland China, Mexico", Depth=800µm, Dissipation Factor=0.1%, Export Control Classification Number (ECCN) Code=EAR99, Harmonized Tariff Schedule (HTS) Code=8532.24.00.20, Height=800µm, Introduction Date=1997-02-01, Lead Free="Lead Free", Lead Pitch=700µm, Length=1.6mm, Lifecycle Status=Production, Material=Ceramic, Mounting Technology="Surface Mount", Number of Terminals=2, Packaging="Cut Tape", Pins=2, Radiation Hardening=No, REACH SVHC=Yes, RoHS=Compliant, Schedule B="8532240020, 8532240020", Termination=SMD/SMT, Thickness=863.6µm, Voltage Rating=50V, Voltage Rating (AC)=50V, Voltage Rating (DC)=50V, Width=800µm
C10 C12 C13 C14 C15 C16 C23 C24 C25: library part CMP-00054-1, "Ceramic Capacitor, Multilayer, Ceramic, 50V, 10% +Tol, 10% -Tol, X7R, 15% TC, 0.1uF, Surface Mount, 0603", Capacitor Type=Ceramic, Case/Package=0603, Max Operating Temperature=125°C, Min Operating Temperature=-55°C, Package Shape=Rectangular, Package Style=SMTMeter, Rated DC Voltage (URdc)=50V, Temperature Characteristics Code=X7R, Tolerance  (fill in as +-)=10%, Dielectric Material=Ceramic, Height=0.8mm, JESD-609 Code=e3, Length=1.6mm, Mounting Technology="Surface Mount", Multilayer=Yes, Packaging="Tape and Reel", Pins=2, Reach SVHC Compliant=Yes, Reference Standard=AEC-Q200, RoHS Compliant=Yes, Terminal Finish=Nickel, Termination=Wraparound, Tolerance (fill in as +-)=10%, Width=0.8mm
C17 C21: library part CMP-00053-1, "Ceramic Capacitor, Multilayer, Ceramic, 25V, 20% +Tol, 20% -Tol, X5R, 15% TC, 10uF, Surface Mount, 0805", Capacitor Type=Ceramic, Case/Package=0805, Max Operating Temperature=85°C, Min Operating Temperature=-55°C, Package Shape=Rectangular, Package Style=SMTMeter, Rated DC Voltage (URdc)=25V, Temperature Characteristics Code=X5R, Tolerance  (fill in as +-)=20%, Dielectric Material=Ceramic, Height=1.25mm, JESD-609 Code=e3, Length=2mm, Mounting Technology="Surface Mount", Multilayer=Yes, Packaging="Tape and Reel", Pins=2, Reach SVHC Compliant=Yes, RoHS Compliant=Yes, Terminal Finish=Nickel, Termination=Wraparound, Tolerance (fill in as +-)=20%, Width=1.25mm
D1: library part CMP-00109-2, "Red, Single Color LED, Red, Water Clear", Color=Red, Forward Current=30mA, Forward Voltage=2.4V, Max Operating Temperature=85°C, Min Operating Temperature=-30°C, Reverse Voltage-Max=5V, Channels=1, Color@wavelength=Red, Lens Style="WATER CLEAR", Luminous Intensity-Min=130cd, Luminous Intensity-Nom=54mcd, Mounting Technology="Surface Mount", Optoelectronic Device Type="SINGLE COLOR LED", Overall Height=0.8mm, Packaging="Tape and Reel", Pins=2, Reach SVHC Compliant=Yes, RoHS Compliant=Yes, Shape=Rectangular, Size=1.1mm, Terminal Pitch=1.5mm, Viewing Angle=130°
D2: library part CMP-00387-1, "PMEG2010 Series 20 V 1 A SMT Low VF MEGA Schottky Barrier Rectifier - SOD-123W", Average Rectified Current=1A, Forward Voltage=340mV, Manufacturer Lifecycle Status="RELEASED FOR SUPPLY", Max Forward Surge Current (Ifsm)=50A, Max Operating Temperature=150°C, Max Power Dissipation=1.8W, Max Repetitive Reverse Voltage (Vrrm)=20V, Max Reverse Leakage Current=50µA, Min Operating Temperature=-55°C, Contact Plating=Tin, Country of Origin="Mainland China", Element Configuration=Single, Export Control Classification Number (ECCN) Code=EAR99, Forward Current=1A, Harmonized Tariff Schedule (HTS) Code=8541.10.00.80, Introduction Date=2009-04-22, Lead Free="Lead Free", Lifecycle Status=Production, Max Output current=1A, Max Reverse Voltage (DC)=20V, Max Surge Current=50A, Mounting Technology="Surface Mount", Number of Elements=1, Number of Terminals=2, Peak Non-Repetitive Surge Current=50A, Peak Reverse Current=50µA, Pins=2, Radiation Hardening=No, REACH SVHC=No, Reverse Standoff Voltage=20V, RoHS=Compliant, Schedule B=8541100050
FB1: library part CMP-00321-1, "Ferrite Beads Multi-Layer 600Ohm 25% 100MHz 500mA 380mOhm DCR 0603 Automotive Paper T/R", Case Code (Imperial)=0603, Case Code (Metric)=1608, Clock Frequency=100MHz, Current Rating=500mA, DC Resistance (DCR)=380mΩ, Max Operating Temperature=125°C, Min Operating Temperature=-55°C, Tolerance=25%, Case/Package=0603, Core Material=Ferrite, Country of Origin="Japan, Thailand", DC Current=500mA, Depth=800µm, ESR=380mΩ, Export Control Classification Number (ECCN) Code=EAR99, Frequency=100MHz, Harmonized Tariff Schedule (HTS) Code=8504.50.80.00, Height=800µm, Impedance=600Ω, Introduction Date=2001-08-28, Lead Free="Lead Free", Length=1.6mm, Lifecycle Status=Production, Material="Ferrite, Steel", Max Current Rating=500mA, Max DC Current=500mA, Military Standard=Not, Number of Circuits=1, Number of Lines=1, Number of Terminals=2, Packaging="Cut Tape", Pins=2, Radiation Hardening=No, REACH SVHC=Yes, RMS Current (Irms)=500mA, RoHS=Compliant, Schedule B="8543706000, 8543706000", Shielding=Unshielded, Termination=SMD/SMT, Test Frequency=100MHz, Weight=2.012816mg, Width=800µm
J1: library part CMP-00202-1, "THT Vertical Pin Header WR-PHD, Pitch 2.54 mm, Single Row, 12 pins", Color=Black, Contact Resistance=20mΩ, Current Rating=3A, Operating Supply Voltage=250V, Connector Type="Male Pin", Contact Material=Copper, Contact Mating Length=5.9944mm, Contact Plating=Gold, Gender=Male, Lead Pitch=2.54mm, Mounting Technology="Through Hole", Number of Contacts=12, Number of Positions=12, Number of Rows=1, Orientation=Vertical, Packaging=Bulk, Pins=12, Pitch=2.54mm, RoHS=Compliant, Termination=Solder
J2 J3 J4 J5 J6: library part CMP-00382-1, "RF SMA Connector, 1 Contact(s), Female, Board Mount, Surface Mount Terminal, Locking, Jack", Case/Package=SMA, Clock Frequency=26.5GHz, Contact Resistance=4mΩ, Dielectric Material=PTFE, Housing Color=Gold, Insulation Resistance=1GΩ, Max Operating Temperature=165°C, Min Operating Temperature=-65°C, Voltage Rating=170V, Body Material=Brass, Body Plating=Gold, Connector Type="SMA, Socket", Contact Gender=Female, Contact Material=Copper, Contact Plating=Gold, Export Control Classification Number (ECCN) Code=EAR99, Fastening Type=Threaded, Frequency=26.5GHz, Gender=Male, Harmonized Tariff Schedule (HTS) Code=8536.69.40.10, Impedance=50Ω, Insertion Loss (dB)=0.55dB, Introduction Date=2010-04-24, Lifecycle Status=Production, Mounting Technology=Edge, Number of Ports=1, Orientation=Straight, Pins=1, Polarity=Standard, REACH SVHC=Yes, RoHS=Compliant, Shell Material=Brass, Termination=Solder
J7 J8: library part CMP-00194-1, "THT Vertical Pin Header WR-PHD, Pitch 2.54 mm, Single Row, 8 pins", Color=Black, Contact Resistance=20mΩ, Current Rating=3A, Max Operating Temperature=105°C, Min Operating Temperature=-40°C, Operating Supply Voltage=250V, Connector Type="Male Pin", Contact Material=Gold, Contact Mating Length=5.9944mm, Contact Plating=Gold, Gender=Male, Height=8.54mm, Lead Pitch=2.54mm, Mounting Technology="Through Hole", Number of Contacts=8, Number of Positions=8, Number of Rows=1, Orientation=Vertical, Packaging=Bulk, Pins=8, Pitch=2.54mm, RoHS=Compliant, Termination=Solder, Voltage Rating=250V
J9: library part CMP-00200-1, "THT Vertical Pin Header WR-PHD, Pitch 2.54 mm, Single Row, 5 pins", Color=Black, Contact Resistance=20mΩ, Current Rating=3A, Max Operating Temperature=105°C, Min Operating Temperature=-40°C, Operating Supply Voltage=250V, Connector Type="Male Pin", Contact Material=Gold, Contact Mating Length=5.9944mm, Contact Plating=Gold, Gender=Male, Height=8.89mm, Lead Free="Lead Free", Lead Pitch=2.54mm, Mounting Technology="Through Hole", Number of Contacts=5, Number of Positions=5, Number of Rows=1, Orientation=Vertical, Packaging=Bulk, Pins=5, Pitch=2.54mm, RoHS=Compliant, Termination=Solder, Voltage Rating=250V
MH1 MH2 MH3 MH4: library part CMP-00204-1, "Plated M3 mounting hole with loose tolerance. 3.6 mm hole diameter, 4.6 mm plated diameter."
R1: library part CMP-00366-1, "Res Thin Film 0603 200K Ohm 0.1% 0.1W(1/10W) ±25ppm/C Sulfur Resistant Pad SMD Automotive T/R", Case Code (Imperial)=0603, Case Code (Metric)=1608, Max Operating Temperature=155°C, Max Power Dissipation=100mW, Min Operating Temperature=-55°C, Temperature Coefficient=25ppm/°C, Tolerance=0.1%, Voltage Rating=100V, Voltage Rating (DC)=75V, Case/Package=0603, Composition="Thin Film", Country of Origin="Mainland China, Japan", Export Control Classification Number (ECCN) Code=EAR99, Features="Automotive AEC-Q200", Harmonized Tariff Schedule (HTS) Code=8533.21.00.30, Height=400µm, Introduction Date=2006-03-30, Lead Free="Lead Free", Length=1.6mm, Lifecycle Status=Production, Mounting Technology="Surface Mount", Number of Terminals=2, Number of Terminations=2, Power Dissipation=100mW, Power Rating=100mW, REACH SVHC=Yes, RoHS=Compliant, Schedule B=8533210045, Termination=SMD/SMT, Weight=2.012816mg, Width=800µm, Working Voltage=100V
R2: library part CMP-00370-1, "Res Thick Film Array 22 Ohm 1% 0.25W(1/4W) ±200ppm/C ISOL 8-Pin 1206(4 X 0603) Convex SMD T/R", Case Code (Imperial)=1206, Case Code (Metric)=3216, Max Operating Temperature=125°C, Min Operating Temperature=-55°C, Number of Resistors=4, Power Dissipation=250mW, Power Per Element=62.5mW, Temperature Coefficient=200ppm/°C, Tolerance=1%, Voltage Rating (DC)=50V, Case/Package=1206, China RoHS=Non-Compliant, Circuit Type=Isolated, Contact Plating=Tin, Depth=1.6mm, Export Control Classification Number (ECCN) Code=EAR99, Height=500µm, Introduction Date=2003-04-07, Lead Pitch=800µm, Length=3.2mm, Lifecycle Status=Production, Military Standard=Not, Mounting Technology="Surface Mount", Number of Circuits=4, Number of Elements=1, Number of Terminals=8, Pins=8, REACH SVHC=Yes, RoHS=Compliant, Schedule B="8533210025, 8533210025", Terminal Pitch=800µm, Termination=Convex, Width=1.6mm, Working Voltage=50V
R3 R4 R6 R7: library part CMP-00049-1, "Fixed Resistor, Metal Glaze/thick Film, 0.1W, 10000ohm, 75V, 1% +/-Tol, 100ppm/Cel, Surface Mount, 0603", Case/Package=0603, Max Operating Temperature=155°C, Min Operating Temperature=-55°C, Package Height=0.45mm, Package Length=1.6mm, Package Shape=Rectangular, Package Width=0.8mm, Power=100mW, Rated Temperature=70°C, Resistor Type="FIXED RESISTOR", Temperature Coefficient (ppm/Cel)=100, Tolerance=1%, Working Voltage=75V, Additional Feature="LASER TRIMMABLE", Construction=Chip, JESD-609 Code=e3, Mounting Technology="Surface Mount", Packaging="Tape and Reel", Pins=2, Reach SVHC Compliant=Yes, RoHS Compliant=Yes, Technology="METAL GLAZE/THICK FILM", Terminal Finish=Nickel, Termination=Wraparound
R5: library part CMP-00177-1, "150 Ohm, Res Thick Film 0603 1% 0.1W ±100ppm/°C Molded SMD Paper T/R", Case Code (Imperial)=0603, Case Code (Metric)=1608, Max Operating Temperature=155°C, Max Power Dissipation=100mW, Min Operating Temperature=-55°C, Temperature Coefficient=100ppm/°C, Tolerance=1%, Voltage Rating=75V, Case/Package=0603, China RoHS=Non-Compliant, Composition="Thick Film", Contact Plating=Tin, Features="Automotive AEC-Q200", Height=450µm, Lead Free="Lead Free", Length=1.5494mm, Lifecycle Status=Production, Mounting Technology="Surface Mount", Number of Terminals=2, Number of Terminations=2, Packaging="Cut Tape (CT)", Power Dissipation=100mW, Power Rating=100mW, Radiation Hardening=No, REACH SVHC=Yes, RoHS=Compliant, Schedule B="8533210045, 8533210045", Width=800µm, Working Voltage=75V
T1 T2 T3 T4: library part CMP-00368-1, "RF Transformer, 10000MHz Min, 24000MHz Max", Clock Frequency=24GHz, Max Operating Temperature=85°C, Min Operating Temperature=-40°C, Export Control Classification Number (ECCN) Code=EAR99, Height=1mm, Insertion Loss (dB)=2.2dB, Introduction Date=2019-12-24, Length=2mm, Lifecycle Status=Production, Mounting Technology="Surface Mount", RoHS=Compliant, Width=2mm
TP1 TP2 TP3 TP4 TP5 TP6 TP7 TP8 TP9 TP10 TP12 TP13 TP14 TP15 TP16 TP17 TP18 TP19: library part CMP-00284-1, "32 mil (0.8 mm) test point."
U1: library part CMP-00363-1, "10 GHz to 40 GHz, 4-Channel Rx Mixer with 4× LO Multiplier/Filter", Clock Frequency=40GHz, Manufacturer Lifecycle Status=PRODUCTION, Max Junction Temperature (Tj)=135°C, Max Operating Temperature=85°C, Max Supply Voltage=2.75V, Min Operating Temperature=-40°C, Min Supply Voltage=1.6V, Bandwidth=800MHz, Gain=21dB, Height=780µm, Lifecycle Status=Production, Noise Figure=11dB, Pins=48, RoHS=Compliant, Schedule B="8542390000, 8542390000"
U2: library part CMP-00379-1, "IC BUS TRANSCVR 8BIT 24TVSOP / Voltage Level Translator 8-CH Bidirectional 24-Pin TVSOP T/R", Case/Package=TFSOP, High Level Output Current=-32mA, Low Level Output Current=32mA, Manufacturer Lifecycle Status=ACTIVE, Max Operating Temperature=85°C, Max Supply Voltage=5.5V, Min Operating Temperature=-40°C, Min Supply Voltage=1.65V, Operating Supply Voltage=3.3V, Quiescent Current=15µA, Contact Plating=Gold, Data Rate=500Mbps, Direction=Bidirectional, Height=1.2mm, Lead Free="Lead Free", Length=5mm, Lifecycle Status=Production, Logic Function="Transceiver, Translator", Mounting Technology="Surface Mount", Number of Bits=8, Number of Channels=8, Number of Circuits=1, Number of Elements=1, Number of Inputs=8, Number of Outputs=8, Number of Transceivers=8, Packaging="Cut Tape", Pins=24, Polarity=Non-Inverting, Propagation Delay=4.2ns, Radiation Hardening=No, REACH SVHC=No, RoHS=Compliant, Schedule B=8542390000, Termination=SMD/SMT, Thickness=1.05mm, Topology=Push-Pull, Turn-On Delay Time=32.2ns, Weight=60.894776mg, Width=4.4mm
U3 U5: library part CMP-00336-1, "Dual Supply Level Translator 2-bit Bidirectional 0.95V to 5.5V 8-Pin VSSOP", Load Capacitance=5pF, Low Level Output Current=12mA, Manufacturer Lifecycle Status="RELEASED FOR SUPPLY", Max Operating Temperature=125°C, Max Supply Current=13µA, Max Supply Voltage=5.5V, Min Operating Temperature=-40°C, Min Supply Voltage=900mV, Operating Supply Voltage=1.2V, China RoHS=Compliant, Clock Edge Trigger Type="Positive Edge", Direction=Bidirectional, Harmonized Tariff Schedule (HTS) Code=8542.39.00.60, Height - Seated (Max)=1mm, Introduction Date=2024-07-25, Length=2.3mm, Lifecycle Status=Production, Number of Bits=2, Number of Channels=1, Number of Circuits=1, Number of Ports=2, Number of Terminals=8, Propagation Delay=16.5ns, REACH SVHC=Yes, RoHS=Compliant, Terminal Pitch=500µm, Width=2mm
U4: library part CMP-00386-1, "LDO Regulator Pos 2.5V 1.2A 8-Pin SOIC N EP T/R", Case/Package=SOIC, Dropout Voltage=120mV, Manufacturer Lifecycle Status=PRODUCTION, Max Junction Temperature (Tj)=125°C, Max Output current=1.2A, Max Supply Voltage=5.5V, Min Current Limit=1.4A, Min Input Voltage=2.3V, Min Operating Temperature=-40°C, Min Supply Voltage=3V, Nominal Output Voltage=2.5V, Quiescent Current=8mA, Accuracy=0.6%, Contact Plating=Tin, Height=1.75mm, Lead Free="Contains Lead", Lifecycle Status=Production, Max Operating Temperature=125°C, Mounting Technology="Surface Mount", Number of Outputs=1, Number of Regulators=1, Output Current=1.2A, Output Type=Fixed, Output Voltage=2.5V, Packaging="Cut Tape", Pins=8, Polarity=Positive, REACH SVHC=No, RoHS=Compliant, Schedule B="8542390000, 8542390000"

## Via types
v1: diameter 25, hole 15, Layer 1 to Layer 4, tented both sides, 402 vias

## Nets (pads, with @x,y where several pads share a name; then routed paths per layer and width w, separated by ;. In a path a pad name is that pad's centre, name@x,y a point inside that pad or via, vN(x,y) a via of type N, cw(c..) or ccw(c..) an arc to the next point about the centre after c; other vN are vias at no path point)
+1.8: C1.2 C11.2 C12.1 C14.1 C16.1 C25.1 J9.3 R1.1 U1.32 U1.33 U2.23 U2.24 U3.8 U5.8 | length 3940.8
  Layer 1 w8: C14.1@4325.12,2425 4328.39,2421.73 U2.24@4328.39,2332.99 U2.23@4344.13,2332.99
  Layer 1 w10: U1.33@3528.11,2944.37 U1.32@3528.11,2924.68 3565.79,2924.68 3570.61,2929.5 v1(3574.67,2929.5) ; v1@3576.34,2926.63 C1.2@3605.42,2926.63 ; v1(3735,2285) 3735.45,2284.55 3787.57,2284.55 C16.1@3788.02,2284.09 ; C16.1@3789.33,2281.89 U3.8@3850.47,2281.89 ; v1(3855,2470) 3855,2529.63 R1.1@3855.37,2530 ; v1(4035,2225) 4036.28,2226.28 4036.28,2278.72 4038.5,2280.94 4089.97,2280.94 4090.47,2281.44 U5.8@4090.47,2281.89 ; v1(4305,2480) 4325.12,2459.88 C14.1@4325.12,2430
  Layer 1 w20: C12.1@4125,3720.04 C11.2@4125,3795 4126.7,3796.7 4126.7,3823.28 4138.42,3835 4229.53,3835 J9.3@4299.53,3905
  Layer 3 w20: v1(3574.67,2929.5) 3630.5,2929.5 3855,2705 v1(3855,2470) ; v1(3735,2285) 3735,2350 v1(3855,2470) ; v1@3735.96,2284.04 3795,2225 v1(4035,2225) ; J9.3@4299.53,3905 4260,3865.47 4260,3435 4305,3390 v1(4305,2480) 3869.06,2480 3859.06,2470 v1(3855,2470)
+2.5: C2.2 C3.1 C4.1 C5.1 C6.1 C7.1 C8.1 C21.1 J1.11 R5.1 U1.1 U1.13 U1.38 U4.1 U4.2 | length 801.3
  Layer 1 w10: v1(2980.61,3099.39) C2.2@3034.08,3099.39 3034.67,3099.99 3108.45,3099.99 C3.1@3109.04,3100.58 3188.35,3100.58 C4.1@3189.91,3102.14 ; C5.1@3095.71,2756.15 3231.15,2756.15 3261.89,2786.89 U1.13@3291.89,2786.89 ; C4.1@3191.56,3100.58 3190,3099.01 3190,3060 3226.89,3023.11 U1.1@3291.89,3023.11 ; U1.38@3508.43,3023.11 3508.43,3053.43 3527.9,3072.9 3527.9,3116.77 3530,3118.87 v1(3530,3160) ; v1@3527.9,3162.1 3528.95,3163.14 3528.95,3196.59 C7.1@3527.9,3197.64 ; v1@3660,3875 R5.1@3701.34,3875
  other v1: 3230.82,2756.49 4200,3675 4200,3720 4199.67,3770.33 3659.67,3875.33
CS: R2.2 TP6.1 U2.21 | length 668.2
  Layer 1 w8: R2.2@3940,2645 3970,2645 4000,2615 v1(4000,2570) ; v1(4250.92,2515.5) TP6.1@4324.5,2515.5 4375.63,2464.37 U2.21@4375.63,2332.99
  Layer 4 w8: v1(4000,2570) 4054.5,2515.5 v1(4250.92,2515.5)
CS_ADAR: R1.2 R2.7 TP2.1 U1.25 | length 649.1
  Layer 1 w8: U1.25@3528.11,2786.89 3528.11,2731.89 3615,2645 R2.7@3871.1,2645 3899.52,2645 3904.2,2640.31 R1.2@3904.2,2530.43 ; TP2.1@3905,2460 R1.2@3905,2529.63
  Layer 1 w10: R1.2@3904.63,2530 R1.2@3905,2529.63
CS_MCU: J1.6 U2.3 | length 408.8
  Layer 1 w8: J1.6@4068.23,1905 4178.23,2015 4325,2015 4359.86,2049.86 U2.3@4359.88,2107.01